# Altium PCB PCB1.PcbDoc
Units mm, origin at the board's own origin, x right, y up, seen from the top; angles counter-clockwise.
Board outline 152.4 x 101.6 mm, 2 copper layers (Top Layer, Bottom Layer); 26 components, 24 nets, 112 pads, 0 vias.
Unrouted connection lines stored in the file: 26.
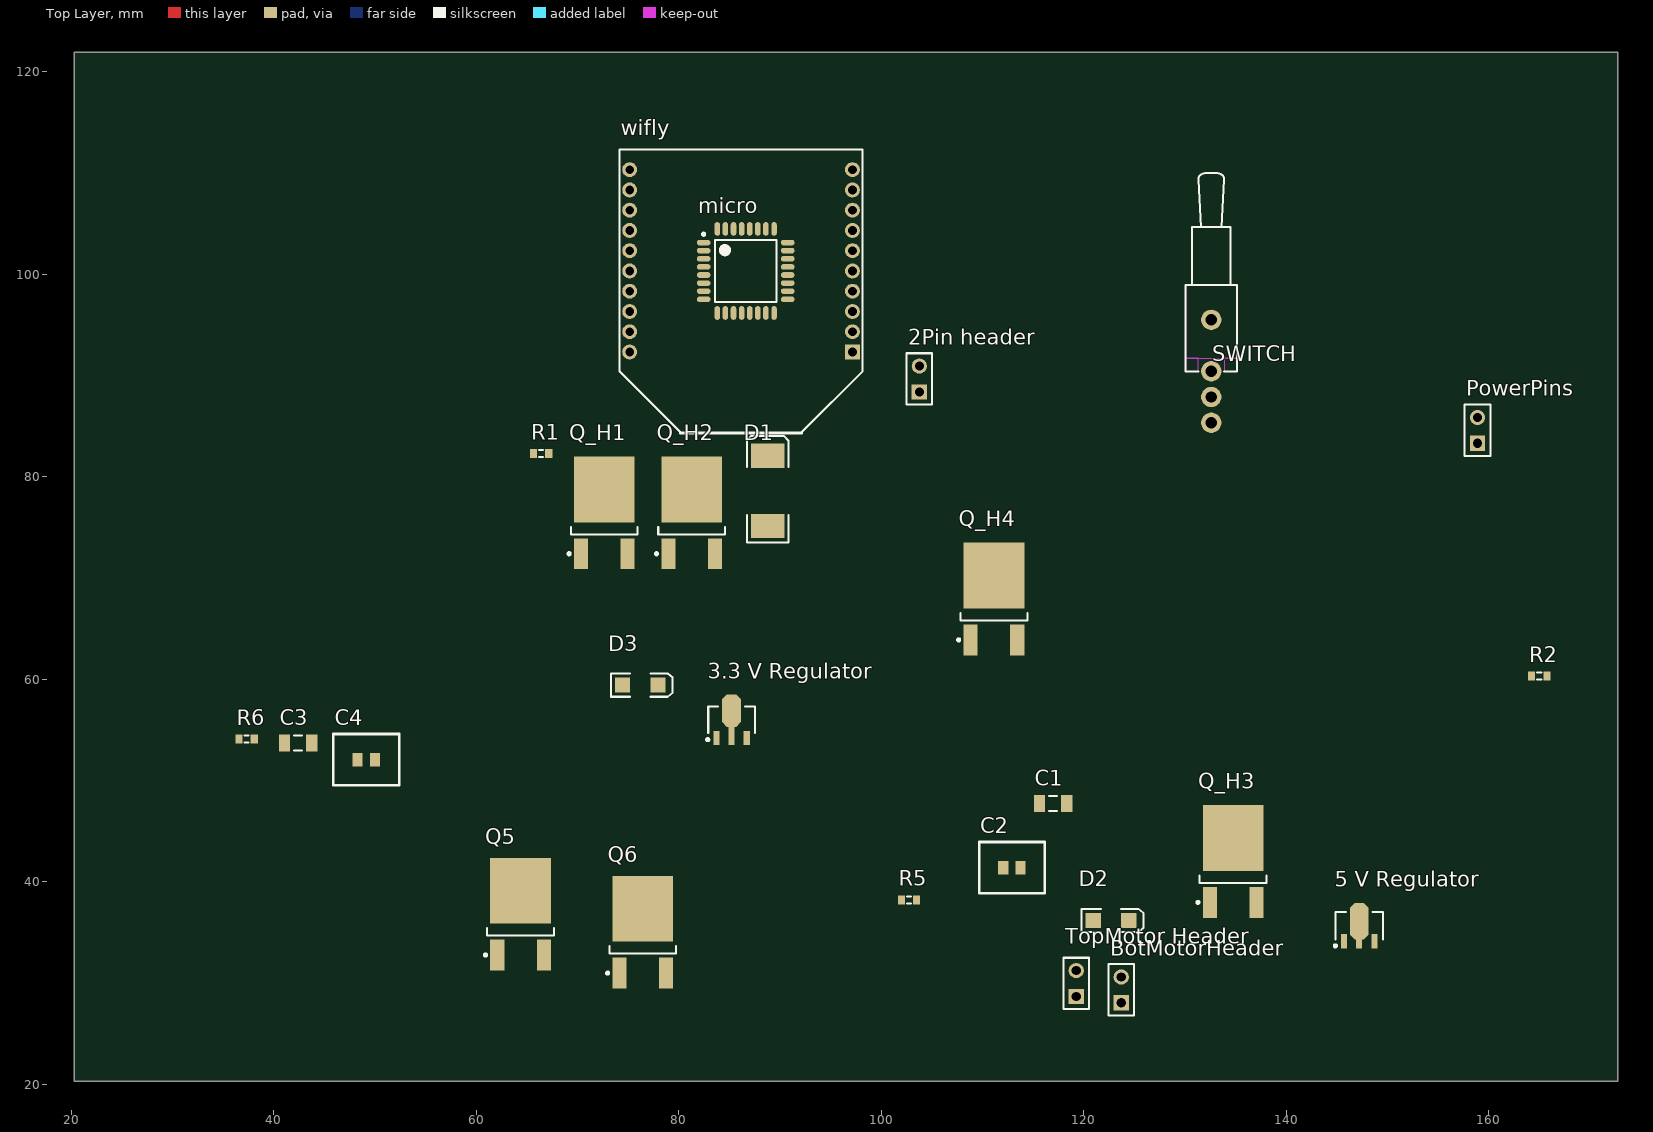
[diagram p0: Top Layer view]
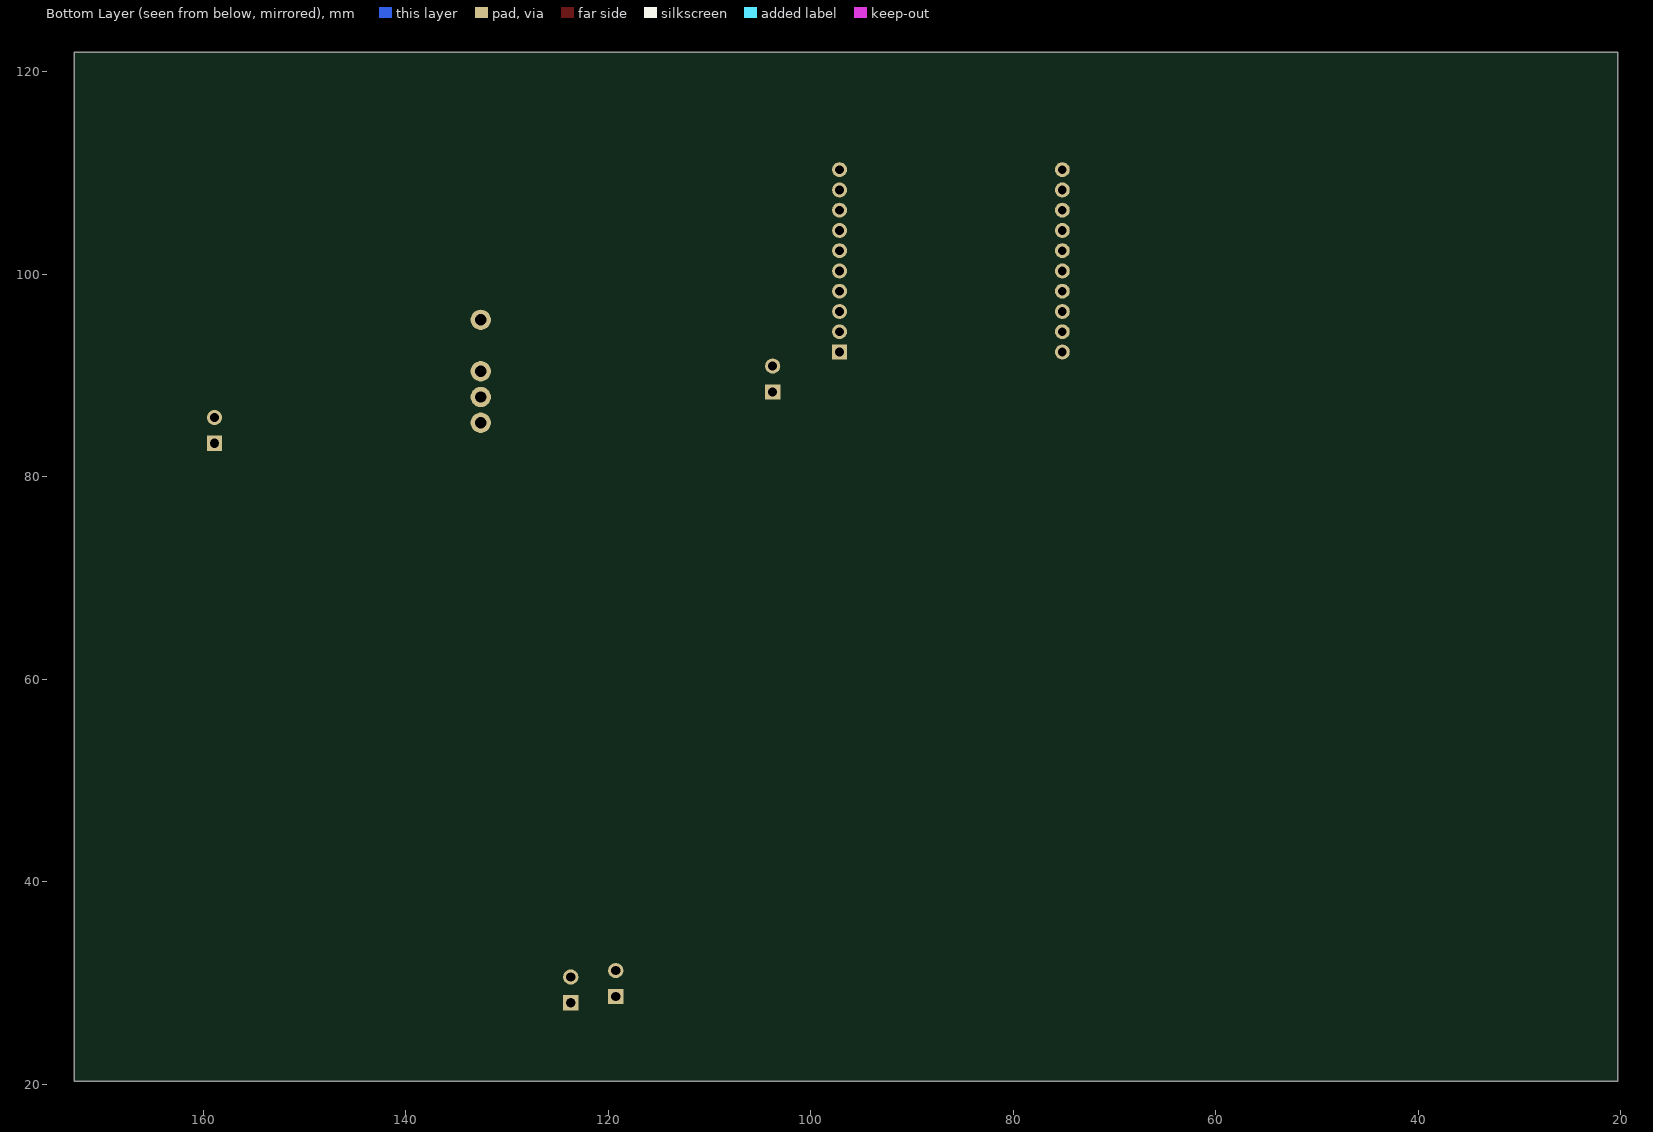
[diagram p1: Bottom Layer view, seen from below]

## Layer stack, top to bottom
Top Layer: signal copper 0.0356
Dielectric: dielectric 0.32, FR-4, Dk 4.8
Bottom Layer: signal copper 0.0356

## Board outline
20.32,20.32 172.72,20.32 172.72,121.92 20.32,121.92

## Design rules (kind name [scope] priority, off if disabled: settings)
AssemblyTestPointUsage AssemblyTestPointUsage_1 [All] p2:
AssemblyTestpoint AssemblyTestpoint_1 [All] p2: testpointundercomponent=TRUE minsize=1.016 maxsize=2.54 preferedsize=1.524 minholesize=0 maxholesize=1.016 preferedholesize=0.813 testpointgrid=0.025 usegrid=TRUE gridtolerance=0 allowsidetop=TRUE allowsidebottom=TRUE
Clearance [All] p1: gap=0.2
ComponentClearance ComponentClearance_1 [All] p2: gap=0.254 collisioncheckmode=3 verticalgap=0.254 showdistances=FALSE
DiffPairsRouting DiffPairsRouting_1 [All] p2: maxlimit=0.254 minlimit=0.254 mostfreqgap=0.254 maxuncoupledlength=12.7
FabricationTestPointUsage TestPointUsage [All] p2: valid=0 allowmultiple=FALSE
FabricationTestpoint Testpoint [All] p2: side=3 testpointundercomponent=TRUE minsize=1.016 maxsize=2.54 preferedsize=1.524 minholesize=0 maxholesize=1.016 preferedholesize=0.813 testpointgrid=0.025 allowsidetop=TRUE allowsidebottom=TRUE usegrid=TRUE gridtolerance=0
FanoutControl Fanout_LCC [IsLCC] p1: bgadir=Out bgaviamode=Centered fanoutstyle=Auto fanoutdirection=Alternating viagrid=0.025 // Fanout_LCC (Default Rule)
FanoutControl Fanout_BGA [IsBGA] p2: bgadir=Out bgaviamode=Centered fanoutstyle=Auto fanoutdirection=Alternating viagrid=0.025 // Fanout_BGA (Default Rule)
FanoutControl Fanout_Small [(CompPinCount < 5)] p3: bgadir=Out bgaviamode=Centered fanoutstyle=Auto fanoutdirection=OutThenIn viagrid=0.025 // Fanout_Small (Default Rule)
FanoutControl Fanout_SOIC [IsSOIC] p4: bgadir=Out bgaviamode=Centered fanoutstyle=Auto fanoutdirection=Alternating viagrid=0.025 // Fanout_SOIC (Default Rule)
FanoutControl Fanout_BGA_1 [IsBGA] p6: bgadir=Out bgaviamode=Centered fanoutstyle=Auto fanoutdirection=Alternating viagrid=0.025 // Fanout_BGA (Default Rule)
FanoutControl Fanout_LCC_1 [IsLCC] p7: bgadir=Out bgaviamode=Centered fanoutstyle=Auto fanoutdirection=Alternating viagrid=0.025 // Fanout_LCC (Default Rule)
FanoutControl Fanout_SOIC_1 [IsSOIC] p8: bgadir=Out bgaviamode=Centered fanoutstyle=Auto fanoutdirection=Alternating viagrid=0.025 // Fanout_SOIC (Default Rule)
FanoutControl Fanout_Small_1 [(CompPinCount < 5)] p9: bgadir=Out bgaviamode=Centered fanoutstyle=Auto fanoutdirection=OutThenIn viagrid=0.025 // Fanout_Small (Default Rule)
FanoutControl Fanout_Default_1 [All] p10: bgadir=Out bgaviamode=Centered fanoutstyle=Auto fanoutdirection=Alternating viagrid=0.025 // Fanout_Default (Default Rule)
Height Height_1 [All] p2: minheight=0 maxheight=25.4 prefheight=12.7
HoleSize HoleSize_1 [All] p2: absolutevalues=TRUE maxlimit=2.54 minlimit=0.025 maxpercent=80.000 minpercent=20.000
HoleToHoleClearance HoleToHoleClearance_1 [All] p2: gap=0.254 allowstackedmicrovias=TRUE
LayerPairs LayerPairs_1 [All] p2: enforce=TRUE
MinimumSolderMaskSliver MinimumSolderMaskSliver_1 [All] p2: minsoldermaskwidth=0.254
NetAntennae NetAntennae_1 [All] p2: netantennaetolerance=0
PasteMaskExpansion PasteMaskExpansion_1 [All] p2: expansion=0
PlaneClearance PlaneClearance_1 [All] p2: clearance=0.508
PolygonConnect [All] p1: connectstyle=Relief reliefconductorwidth=0.254 reliefentries=4 polygonreliefangle="90 Angle"
PolygonConnect PolygonConnect_1 [All] p2: connectstyle=Relief reliefconductorwidth=0.254 reliefentries=4 polygonreliefangle="90 Angle"
RoomDefinition FinalSchematic [InComponentClass('FinalSchematic')] p1: confinementstyle=ConfineIn formatcopy=TRUE lockcomponents=FALSE outline 173.863,21.971 454.787,21.971 454.787,53.594 173.863,53.594
RoutingPriority RoutingPriority_1 [All] p2: routingpriority=0
RoutingTopology RoutingTopology_1 [All] p2: topology=Shortest
RoutingVias [All] p1: holewidth=0.6 width=1 viastyle="Through Hole" minholewidth=0.711 minwidth=1.27 maxholewidth=0.711 maxwidth=1.27
ShortCircuit ShortCircuit_1 [All] p2: allowed=FALSE
SilkToSilkClearance SilkToSilkClearance_1 [All] p2: silktosilkclearance=0.254
SilkscreenOverComponentPads [All] p1: minsilkscreentomaskgap=0.254
SilkscreenOverComponentPads SilkscreenOverComponentPads_1 [All] p2: minsilkscreentomaskgap=0.254
SolderMaskExpansion [All] p1: expansion=0.102
SolderMaskExpansion SolderMaskExpansion_1 [All] p2: expansion=0.102
UnRoutedNet UnRoutedNet_1 [All] p2:
Width [All] p1: maxlimit=0.2 minlimit=0.2 preferedwidth=0.2
23 further rules are at their usual default settings.

## Components (designator, comment, footprint, x,y, rotation, side; value= is the part's Value field where it differs from the comment)
"2Pin header" "2Pin header" HDR1X2 103.759,88.392 r90 top
"3.3 V Regulator" "TO-220 3.3 V Regulator" SOT89-150P410X160-3N 85.217,56.007 r90 top
"5 V Regulator" "5v Regulator" SOT89-150P360X170-3N 147.193,35.687 r90 top
BotMotorHeader "2Pin header" HDR1X2 123.698,28.067 r90 top
C1 "Cap" C1206 116.967,47.752 r0 top
C2 "Cap" Capfixed 112.903,41.402 r0 top
C3 "Cap" C1206 42.418,53.721 r0 top
C4 "Cap" Capfixed 49.149,52.07 r0 top
D1 "Diode" SMC 88.773,78.613 r90 top
D2 "LED2" 3.2X1.6X1.1 122.682,36.195 r0 top
D3 "LED2" 3.2X1.6X1.1 76.2,59.436 r0 top
micro "ATmega328-AU" 32A_L 86.614,100.33 r0 top
PowerPins "2Pin header" HDR1X2 158.877,83.312 r90 top
Q5 "transistor" Transistornew 64.389,36.83 r90 top
Q6 "transistor" Transistornew 76.454,35.052 r90 top
Q_H1 "transistor" Transistornew 72.644,76.454 r90 top
Q_H2 "transistor" Transistornew 81.28,76.454 r90 top
Q_H3 "transistor" Transistornew 134.747,42.037 r90 top
Q_H4 "transistor" Transistornew 111.125,67.945 r90 top
R1 "Res3" J1-0603 66.421,82.296 r0 top
R2 "Res3" J1-0603 164.973,60.325 r0 top
R5 "Res3" J1-0603 102.743,38.227 r0 top
R6 "Res3" J1-0603 37.338,54.102 r0 top
SWITCH "SW-SPDT" TL36WW15050 132.588,90.424 r90 top
"TopMotor Header" "2Pin header" HDR1X2 119.253,28.702 r90 top
wifly "RN-XV" XBEE 97.155,92.329 r90 top

## Footprints (in the part's own frame and the unit in brackets; to place one, negate y for a bottom-side part, rotate by r counter-clockwise, add the part's x,y. Pads: shape width x height; smd on the part's side, far side on the other; paste and mask are expansions set on the pad)
3.2X1.6X1.1 [mm] "SMT LED; 2 Flat Leads"
  rect 1.5x1.5 smd: 1(-1.75,0) 2(1.75,0)
  silkscreen extent -2.9,-1.15 3.2,1.15
32A_L [mm] "Thin QFP, 32-Leads, Body 7x7mm, Pitch 0.8mm, IPC High Density"
  oval 1.35x0.55 smd: 1(-4.15,2.8) 2(-4.15,2) 3(-4.15,1.2) 4(-4.15,0.4) 5(-4.15,-0.4) 6(-4.15,-1.2) 7(-4.15,-2) 8(-4.15,-2.8) 17(4.15,-2.8) 18(4.15,-2) 19(4.15,-1.2) 20(4.15,-0.4) 21(4.15,0.4) 22(4.15,1.2) 23(4.15,2) 24(4.15,2.8)
  oval 0.55x1.35 smd: 9(-2.8,-4.15) 10(-2,-4.15) 11(-1.2,-4.15) 12(-0.4,-4.15) 13(0.4,-4.15) 14(1.2,-4.15) 15(2,-4.15) 16(2.8,-4.15) 25(2.8,4.15) 26(2,4.15) 27(1.2,4.15) 28(0.4,4.15) 29(-0.4,4.15) 30(-1.2,4.15) 31(-2,4.15) 32(-2.8,4.15)
  silkscreen extent -4.27,-3.05 3.05,3.75, body extent -3.5,-3.5 3.5,3.5, height 1.2
C1206 [mm] "Chip Capacitor, Body 3.2x1.6mm, IPC High Density"
  rect 1.1x1.7 smd: 1(-1.35,0) 2(1.35,0)
  silkscreen extent -0.4,-0.75 0.4,0.75, body extent -1.7,-0.9 1.7,0.9, height 1.3
Capfixed [mm]
  rect 1x1.3 smd: 1(-0.85,0) 2(0.85,0)
  silkscreen extent -3.24,-2.54 3.24,2.54
HDR1X2 [mm] "Connector; Header; 2 Position"
  rect 1.5x1.5 hole 0.9: 1(0,0)
  round 1.5 hole 0.9: 2(2.54,0)
  silkscreen extent -1.27,-1.27 3.81,1.27
J1-0603 [mm] "Chip Resistor, Body 1.6x0.8mm, IPC High Density"
  rect 0.7x0.9 smd: 1(-0.75,0) 2(0.75,0)
  silkscreen extent -0.2,-0.35 0.2,0.35, body extent -0.85,-0.48 0.85,0.48, height 0.9
SMC [mm] "DO-214-AB/SMC; 2 C-Bend Leads; Body 7.9 x 5.9 mm, inc. leads (LxW)"
  rect 2.4x3.3 smd: 1(-3.475,0) 2(3.475,0)
  silkscreen extent -5.07,-2.05 5.43,2.05
SOT89-150P360X170-3N [mm] "SOT89, 3-Leads, Body 4.5x2.5mm (max), Pitch 1.50mm, Lead Span 3.6mm, IPC Medium Density"
  rect 1.4x0.6 smd: 1(-1.55,1.5) 3(-1.55,-1.5)
  rect 0.9x0.6 smd: 2(-1.8,0)
  oct 3.6x1.8 smd: 2(0.45,0)
  silkscreen extent -2.12,-2.35 1.35,2.47, body extent -1.35,-2.35 1.35,2.35, height 1.7
SOT89-150P410X160-3N [mm] "SOT89, 3-Leads, Body 4.5x2.4mm (max), Pitch 1.50mm, Lead Span 4.1mm, IPC Medium Density"
  rect 1.4x0.6 smd: 1(-1.8,1.5) 3(-1.8,-1.5)
  rect 1.8x0.6 smd: 2(-1.6,0)
  oct 3.2x1.9 smd: 2(0.9,0)
  silkscreen extent -2.07,-2.3 1.3,2.47, body extent -1.3,-2.3 1.3,2.3, height 1.6
TL36WW15050 [mm] "Switch; 4 Leads"
  round 2 hole 1.1: 1(0,0) 2(-2.54,0) 3(-5.08,0) M(5.08,0)
  Top Layer keep-out region: 0,-1.27 0,-2.54 1.27,-2.54 1.27,-1.27
  Top Layer keep-out region: 0,2.54 0,1.27 1.27,1.27 1.27,2.54
  Top Layer keep-out region: 1.27,2.54 1.27,-2.54 8.509,-2.54 8.509,2.54
  silkscreen extent 0,-2.54 19.56,2.54
Transistornew [mm] "D-PAK, 3-Pads, Body 6.1x6.6mm (max), IPC Medium Density"
  rect 3.05x1.4 smd: 1(-4.05,2.3) 3(-4.05,-2.3)
  rect 6.5x6 smd: 4(2.3,0)
  silkscreen extent -4.17,-3.3 -1.4,3.6, body extent -2.3,-3.3 3.8,3.3, height 2.39
XBEE [mil]
  rect 58x58 hole 34: 1(0,0)
  round 58 hole 34: 2(78.73,0) 3(157.47,0) 4(236.2,0) 5(314.93,0) 6(393.67,0) 7(472.4,0) 8(551.13,0) 9(629.87,0) 10(708.6,0) 11(708.6,866.07) 12(629.87,866.07) 13(551.13,866.07) 14(472.4,866.07) 15(393.67,866.07) 16(314.93,866.07) 17(236.2,866.07) 18(157.47,866.07) 19(78.73,866.07) 20(0,866.07)
  silkscreen extent -315,-39 787,905

## Part data
C1 C2 C3 C4: "Capacitor"
D1: "Default Diode"
D2 D3: "Typical RED, GREEN, YELLOW, AMBER GaAs LED"
micro: "8-bit AVR Microcontroller, 32KB Flash, 1KB EEPROM, 2KB SRAM, 32-pin TQFP, Industrial Grade (-40°C to 85°C)"
R1 R2 R5 R6: "Resistor"
SWITCH: "SPDT Subminiature Toggle Switch, Right Angle Mounting, Vertical Actuation"

## Nets (pads, with @x,y where several pads share a name; then routed paths per layer and width w, separated by ;. In a path a pad name is that pad's centre, name@x,y a point inside that pad or via, vN(x,y) a via of type N, cw(c..) or ccw(c..) an arc to the next point about the centre after c; other vN are vias at no path point)
+3.3V: C4.2 D3.1 R2.2 wifly.1
+5V: C2.2 D2.1 micro.4 micro.6 micro.18 R1.2
+6V: D1.1
BOTTOMMOTOR: micro.9
GND: C1.1 C2.1 C3.1 C4.1 micro.3 micro.5 micro.21 R5.1 R6.1 wifly.10
HBACK: 
HBRIDGE1: micro.13
HBRIDGE2: micro.14
HFOR: 
MISO: micro.16
MOSI: micro.15
NetD1_2: D1.2 SWITCH.1
NetD2_2: D2.2 R5.2
NetD3_2: D3.2 R6.2
NetHeader_In: wifly.8
NetR2_1: R2.1 wifly.5
RESET: micro.29 R1.1
RX_ATM: micro.30 wifly.2
SCK: micro.17
TOPMOTOR: micro.10
TRANSTOHEADER1: 
TRANSTOHEADER2: 
TX_ATM: micro.31 wifly.3
VINAFTERSWITCH: C1.2 C3.2 SWITCH.2
pads on no net: "2Pin header.1" "2Pin header.2" "3.3 V Regulator.1" "3.3 V Regulator.2" "3.3 V Regulator.3" "5 V Regulator.1" "5 V Regulator.2" "5 V Regulator.3" "TopMotor Header.1" "TopMotor Header.2" BotMotorHeader.1 BotMotorHeader.2 micro.1 micro.2 micro.7 micro.8 micro.11 micro.12 micro.19 micro.20 micro.22 micro.23 micro.24 micro.25 micro.26 micro.27 micro.28 micro.32 PowerPins.1 PowerPins.2 Q5.1 Q5.3 Q5.4 Q6.1 Q6.3 Q6.4 Q_H1.1 Q_H1.3 Q_H1.4 Q_H2.1 Q_H2.3 Q_H2.4 Q_H3.1 Q_H3.3 Q_H3.4 Q_H4.1 Q_H4.3 Q_H4.4 SWITCH.3 SWITCH.M wifly.4 wifly.6 wifly.7 wifly.9 wifly.11 wifly.12 wifly.13 wifly.14 wifly.15 wifly.16 wifly.17 wifly.18 wifly.19 wifly.20

## Silkscreen, mask and mechanical layers (free items; w line width, h text height)
Mechanical 16:
  drawing of 1285 lines, arcs and shapes, not listed
  text "1" at 36.246,189.611 h1.78
  text "2" at 108.89,189.611 h1.78
  text "3" at 182.042,189.611 h1.78
  text "4" at 254.94,189.611 h1.78
  text "A" at 1.905,166.599 h1.78
  text "A" at 288.925,166.599 h1.78
  text "B" at 1.905,118.542 h1.78
  text "B" at 288.925,118.542 h1.78
  text "C" at 1.905,70.028 h1.78
  text "C" at 288.925,70.028 h1.78
  text "D" at 1.905,22.022 h1.78
  text "D" at 288.925,22.022 h1.78
  text "Altium Limited" at 140.97,15.24 h1.78
  text "12a Rodborough Rd" at 140.97,12.7 h1.78
  text "Frenchs Forest" at 140.97,10.16 h1.78
  text "FILE NAME:" at 173.99,10.16 h1.14
  text "DWG NO:" at 212.09,10.16 h1.14
  text "SCALE:" at 265.43,10.16 h1.14
  text "NSW 2086" at 140.97,7.62 h1.78
  text ".PCB_FILE_NAME_NO_PATH" at 175.26,7.112 h1.78
  text "1" at 36.246,1.651 h1.78
  text "2" at 108.89,1.651 h1.78
  text "3" at 182.042,1.651 h1.78
  text "4" at 254.94,1.651 h1.78